# Altium PCB PCB2.PcbDoc
Units mm, origin at the board's own origin, x right, y up, seen from the top; angles counter-clockwise.
Board outline 80.13 x 28.84 mm, 2 copper layers (Top Layer, Bottom Layer); 36 components, 24 nets, 145 pads, 62 vias.
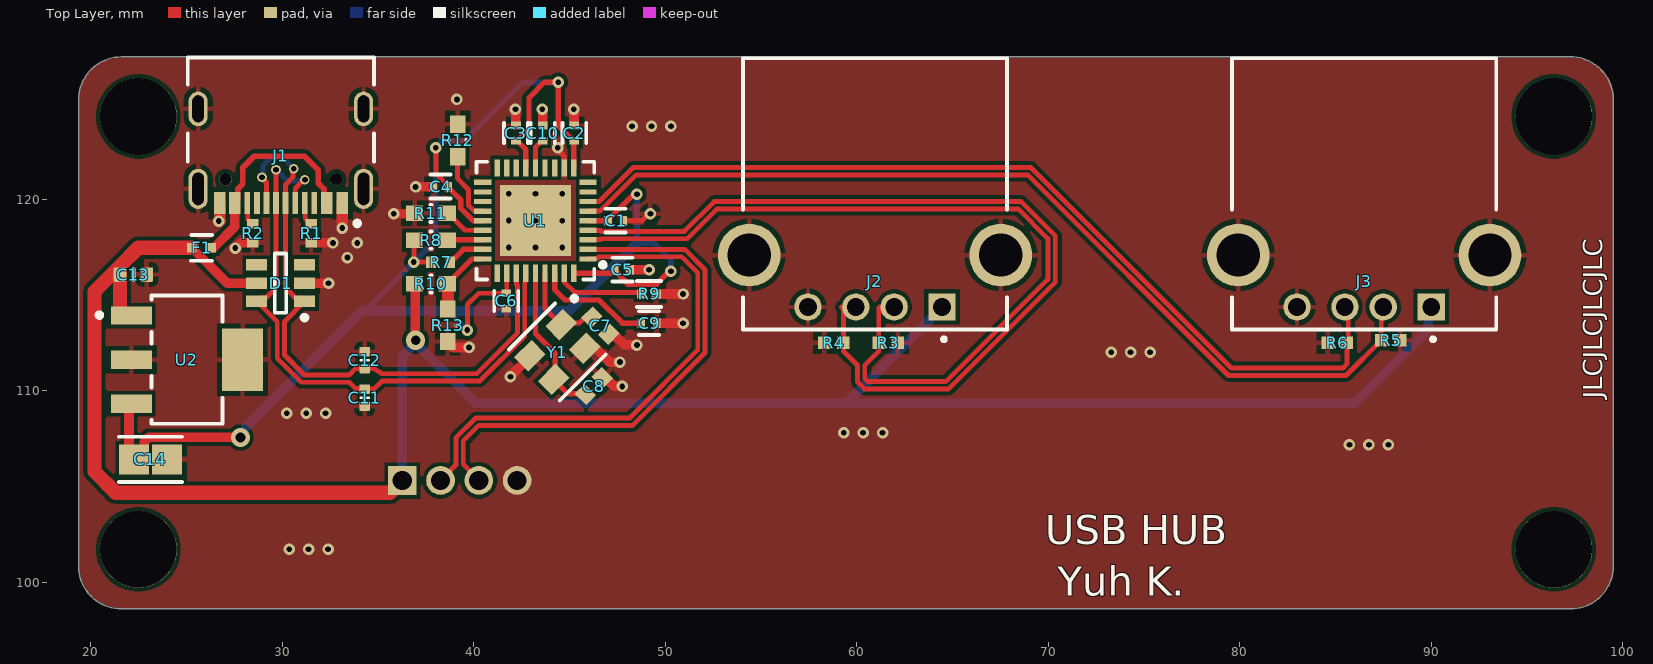
[diagram p0: Top Layer view]
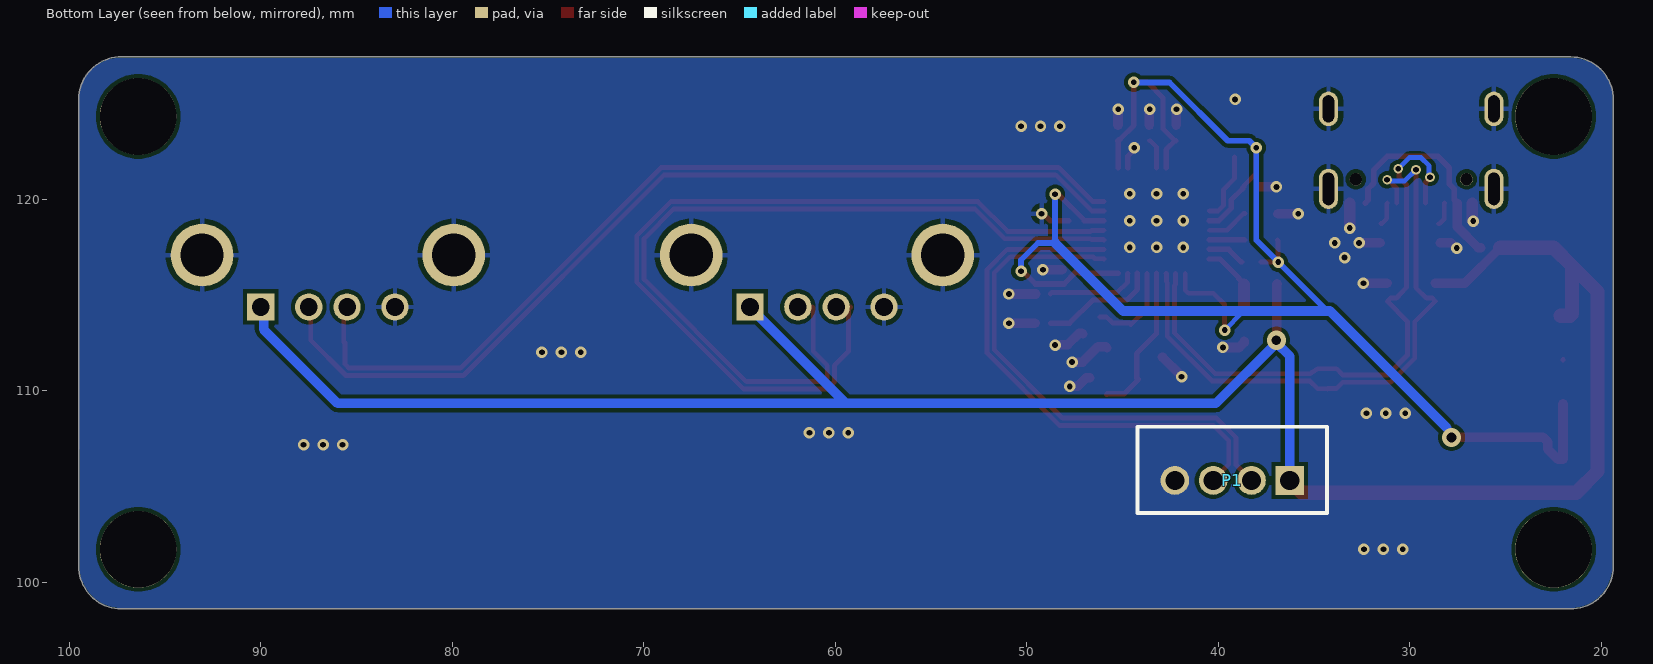
[diagram p1: Bottom Layer view, seen from below]
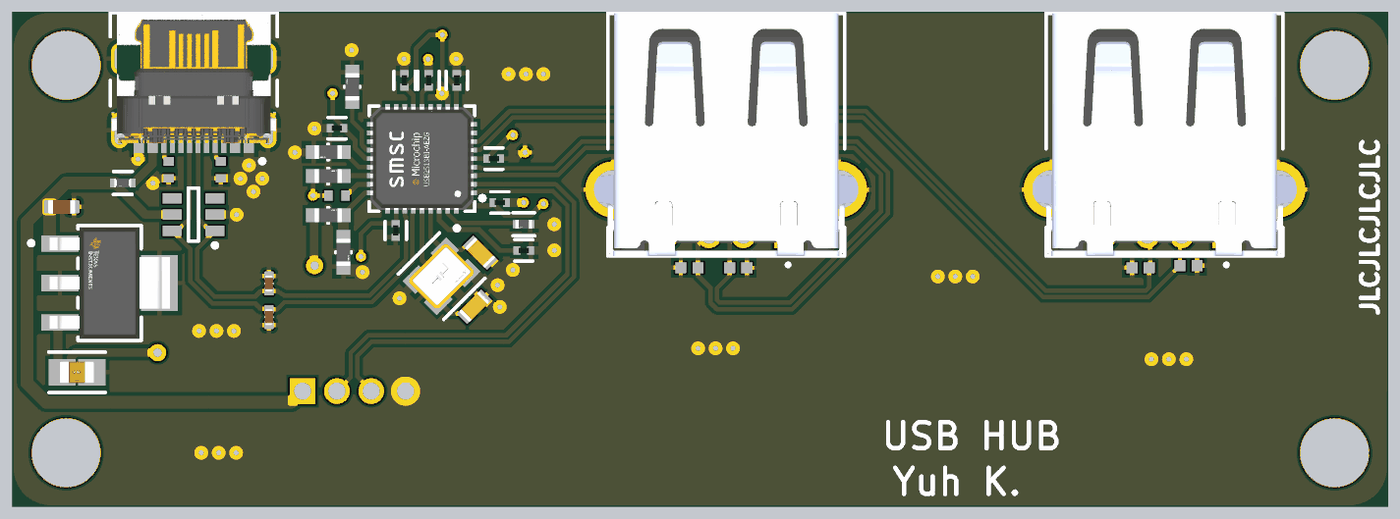
[diagram p2: 3D render of the assembled board from above, using the file's embedded part models]

## Layer stack, top to bottom
Top Solder: solder mask 0.0102, Solder Resist, Dk 3.5
Top Layer: signal copper 0.0356
Dielectric 1: dielectric 0.32, FR-4, Dk 4.8
Bottom Layer: signal copper 0.0356
Bottom Solder: solder mask 0.0102, Solder Resist, Dk 3.5

## Board outline
20.014,99.275 cw(c21.577,100.838) 19.367,100.838 19.367,125.222 cw(c21.621,125.222) 20.027,126.816 20.064,126.834 cw(c21.59,125.235) 21.59,127.445 22.86,127.445 22.862,127.445 96.884,127.445 96.916,127.451 97.258,127.451 cw(c97.258,125.198) 98.851,126.791 cw(c97.288,125.228) 99.498,125.228 99.499,124.741 99.499,124.687 99.499,100.854 cw(c97.245,100.854) 98.839,99.261 cw(c97.276,100.823) 97.276,98.613 96.971,98.613 96.955,98.615 21.608,98.615 cw(c21.608,100.869)

## Design rules (kind name [scope] priority, off if disabled: settings)
Clearance [All] p1: gap=0.2 ignorepadtopadclearanceinfootprint=FALSE except(0.127: Arc-Arc Arc-Track Arc-SMDPad Track-Track Track-SMDPad SMDPad-SMDPad; 0.254: Arc-Via Track-Via SMDPad-Via; 0.33: Arc-THPad Track-THPad SMDPad-THPad; 0.5: THPad-THPad)
DiffPairsRouting [All] p1: maxlimit=0.254 minlimit=0.127 mostfreqgap=0.254 toplayer_minwidth=0.127 toplayer_maxwidth=0.381 toplayer_prefwidth=0.254 bottomlayer_minwidth=0.127 bottomlayer_maxwidth=0.381 bottomlayer_prefwidth=0.254 maxuncoupledlength=12.7
HoleSize [All] p1: absolutevalues=TRUE maxlimit=6.3 minlimit=0.15 maxpercent=80.000 minpercent=20.000
HoleToHoleClearance [All] p1: gap=0.5 allowstackedmicrovias=TRUE
MinimumSolderMaskSliver [All] p1: minsoldermaskwidth=0.1
PolygonConnect PolygonConnect_1 [InComponent('U1')] p1: connectstyle=Direct reliefconductorwidth=0.254 reliefentries=4 polygonreliefangle="90 Angle" airgapwidth=0.254
PolygonConnect [All] p2: connectstyle=Relief reliefconductorwidth=0.254 reliefentries=4 polygonreliefangle="90 Angle" airgapwidth=0.254
RoutingVias [All] p1: holewidth=0.711 width=1.27 viastyle="Through Hole" minholewidth=0.3 minwidth=0.5 maxholewidth=0.711 maxwidth=1.27
SilkToSolderMaskClearance [IsPad] p1: minsilkscreentomaskgap=0.1 clearancetoexposedcopper=TRUE
SolderMaskExpansion [All] p1: expansion=0.102 istentingtop=FALSE
Width [All] p1: maxlimit=0.762 minlimit=0.127 preferedwidth=0.254 minimp=50.000000 maximp=50.000000 favimp=50.000000
25 further rules are at their usual default settings.

## Classes and differential pairs
differential pair PASS_USB_2_D: +PASS_USB_2_D_P -PASS_USB_2_D_N
differential pair PASS_USB_1_D: +PASS_USB_1_D_P -PASS_USB_1_D_N
differential pair MCU_USB_D_R: +MCU_USB_D_R_P -MCU_USB_D_R_N
differential pair HUB_USB_D: +HUB_USB_D_P -HUB_USB_D_N

## Components (designator, comment, footprint, x,y, rotation, side; value= is the part's Value field where it differs from the comment)
C1 "0.1 uF" FP-GRM15-MFG 47.407,118.891 r0 top value=0.10μF
C2 "0.1 uF" FP-GRM15-MFG 45.248,123.463 r90 top value=0.10μF
C3 "0.1 uF" FP-GRM15-MFG 42.2,123.463 r90 top value=0.10μF
C4 "0.1 uF" FP-GRM15-MFG 38.263,120.669 r180 top value=0.10μF
C5 "0.1 uF" FP-GRM15-MFG 47.752,116.332 r0 top value=0.10μF
C6 "0.1 uF" FP-GRM15-MFG 41.692,114.7 r270 top value=0.10μF
C7 "18pF" CAPC1608X90X35LL10T15 46.609,113.411 r135 top
C8 "18pF" CAPC1608X90X35LL10T15 46.264,110.255 r225 top
C9 "0.1 uF" FP-GRM15-MFG 49.149,113.538 r180 top value=0.10μF
C10 "0.1 uF" FP-GRM15-MFG 43.597,123.463 r270 top value=0.10μF
C11 "Capacitor 1nF +/-20% 50V 0402" CAPC0402(1005)33_L 34.298,109.645 r270 top value=1nF
C12 "Capacitor 1nF +/-20% 50V 0402" CAPC0402(1005)33_L 34.301,111.605 r90 top value=1nF
C13 "Capacitor 470nF +/-20% 25V 0603" CAPC0603(1608)100_L 22.225,116.078 r0 top value=470nF
C14 "33uF" FP-C2012-125-0_2-IPC_A 23.114,106.426 r0 top
D1 "SRV05-4.TCT" SMTC-SOT23-6_V 29.904,115.63 r180 top
F1 "ERB-RD0R50X" FP-ERBRD-MFG 25.781,117.475 r180 top value=310mΩ
J1 "USB4105-GF-A" FP-USB4105-GF-A-MFG 29.92,123.566 r180 top
J2 "USB1130-15-A" GCT_USB1130-15-A_REVA 60.946,117.094 r180 top
J3 "USB1130-15-A" GCT_USB1130-15-A_REVA 86.487,117.094 r180 top
P1 "B4B-PH-K-S(LF)(SN)" JST-B4B-PH-K-S_V 39.259,105.876 r0 bottom
R1 "RC0402FR-075K1L" RESC1005X40X25NL05T10 31.496,118.237 r270 top value=5.1k
R2 "RC0402FR-075K1L" RESC1005X40X25NL05T10 28.448,118.237 r270 top value=5.1k
R3 "10k" RESC1005X40X25ML05T05 61.643,112.519 r180 top
R4 "10k" RESC1005X40X25ML05T05 58.801,112.522 r0 top
R5 "10k" RESC1005X40X25ML05T05 87.884,112.649 r180 top
R6 "10k" RESC1005X40X25ML05T05 85.09,112.522 r0 top
R7 "RC0402FR-075K1L" RESC1005X40X25NL05T10 38.263,116.732 r180 top value=5.1k
R8 "100K RC0603FR-07100KL" FP-RC0603-0_55-MFG 37.755,117.875 r0 top
R9 "12K RC0402FR-0712KL" FP-RC0402-0_4-IPC_C 49.149,115.062 r180 top
R10 "100K RC0603FR-07100KL" FP-RC0603-0_55-MFG 37.755,115.589 r0 top
R11 "100K" FP-RC0603-0_55-MFG 37.755,119.272 r180 top
R12 "100K" FP-RC0603-0_55-MFG 39.152,123.082 r90 top
R13 "100K RC0603FR-07100KL" FP-RC0603-0_55-MFG 38.644,113.43 r270 top
U1 "USB2513BI-AEZG" FP-USB2513BI-AEZG-MFG 43.216,118.891 r180 top
U2 "LM3940IMP-3.3/NOPB" FP-DCY0004A-MFG 25.019,111.633 r0 top
Y1 "ABM8-24.000MHZ-D1G-T" FP-ABM8-MFG 44.359,112.033 r225 top

## Footprints (in the part's own frame and the unit in brackets; to place one, negate y for a bottom-side part, rotate by r counter-clockwise, add the part's x,y. Pads: shape width x height; smd on the part's side, far side on the other; paste and mask are expansions set on the pad)
CAPC0402(1005)33_L [mm] "Chip Capacitor, Body 1.0x0.5mm, Height 0.33mm, IPC High Density"
  rrect25% 0.5x0.55 smd: 1(-0.45,0) 2(0.45,0)
  silkscreen extent 0,-0.2 0,0.2, body extent -0.5,-0.25 0.5,0.25, height 0.55
CAPC0603(1608)100_L [mm] "Chip Capacitor, Body 1.6x0.8mm, Height 1.0mm, IPC High Density"
  rrect25% 0.66x0.76 smd: 1(-0.7,0) 2(0.7,0)
  silkscreen extent 0,-0.3 0,0.3, body extent -0.8,-0.4 0.8,0.4, height 0.95
CAPC1608X90X35LL10T15 [mm] "Chip Capacitor, 2-Leads, Body 1.7x0.9mm, IPC High Density"
  rect 0.75x0.85 smd: 1(-0.625,0) 2(0.625,0)
  body extent -0.85,-0.45 0.85,0.45, height 0.9
FP-ABM8-MFG [mm]
  rect 1.3x1.05 smd paste+0 mask+0: 1(-1.15,-0.875) 2(1.15,-0.875) 3(1.15,0.875) 4(-1.15,0.875)
  silkscreen extent -2.73,-1.88 1.7,1.88, body extent -1.9,-1.5 1.9,1.5, height 0.25
FP-C2012-125-0_2-IPC_A [mm]
  rect 1.578x1.556 smd paste+0 mask+0: 1(-0.864,0) 2(0.864,0)
  silkscreen extent -1.65,-1.18 1.65,1.18, body extent -2.15,-1.28 2.15,1.28, height 0.25
FP-DCY0004A-MFG [mm]
  rect 2.15x0.95 smd paste+0 mask+0: 1(-2.9,2.3) 2(-2.9,0) 3(-2.9,-2.3)
  rect 2.15x3.25 smd paste+0 mask+0: 4(2.9,0)
  silkscreen extent -4.7,-3.35 1.85,3.35, body extent -4.08,-3.45 4.08,3.45, height 0.25
FP-ERBRD-MFG [mm]
  rect 0.475x0.5 smd paste+0 mask+0: 1(-0.512,0) 2(0.513,0)
  silkscreen extent -0.56,-0.67 0.55,0.67, body extent -0.85,-0.4 0.85,0.4, height 0.25
FP-GRM15-MFG [mm]
  rect 0.4x0.5 smd paste+0 mask+0: 1(-0.4,0) 2(0.4,0)
  silkscreen extent -0.53,-0.63 0.53,0.63, body extent -0.7,-0.38 0.7,0.38, height 0.25
FP-RC0402-0_4-IPC_C [mm]
  rect 0.515x0.472 smd paste+0 mask+0: 1(-0.379,0) 2(0.379,0)
  silkscreen extent -0.64,-0.67 0.64,0.67, body extent -0.74,-0.38 0.74,0.38, height 0.25
FP-RC0603-0_55-MFG [mm]
  rect 0.9x0.8 smd paste+0 mask+0: 1(-0.85,0) 2(0.85,0)
  silkscreen extent -0.03,-0.45 0.03,0.45, body extent -1.4,-0.55 1.4,0.55, height 0.25
FP-USB2513BI-AEZG-MFG [mm]
  rect 0.9x0.28 smd paste+0 mask+0: 1(-2.75,2) 2(-2.75,1.5) 3(-2.75,1) 4(-2.75,0.5) 5(-2.75,0) 6(-2.75,-0.5) 7(-2.75,-1) 8(-2.75,-1.5) 9(-2.75,-2) 19(2.75,-2) 20(2.75,-1.5) 21(2.75,-1) 22(2.75,-0.5) 23(2.75,0) 24(2.75,0.5) 25(2.75,1) 26(2.75,1.5) 27(2.75,2)
  rect 0.28x0.9 smd paste+0 mask+0: 10(-2,-2.75) 11(-1.5,-2.75) 12(-1,-2.75) 13(-0.5,-2.75) 14(0,-2.75) 15(0.5,-2.75) 16(1,-2.75) 17(1.5,-2.75) 18(2,-2.75) 28(2,2.75) 29(1.5,2.75) 30(1,2.75) 31(0.5,2.75) 32(0,2.75) 33(-0.5,2.75) 34(-1,2.75) 35(-1.5,2.75) 36(-2,2.75)
  rect 3.7x3.7 smd paste+0 mask+0: 37(0,0)
  silkscreen extent -3.65,-3.08 3.08,3.08, body extent -3.3,-3.3 3.3,3.3, height 0.25
FP-USB4105-GF-A-MFG [mm]
  rrect100% 1x2.1 hole 1.7 slot 0.6 at 0 deg paste-1000 mask+0: 1(-4.32,3.015) 2(4.32,3.015)
  rrect100% 1x1.8 hole 1.4 slot 0.6 at 0 deg paste-1000 mask+0: 3(-4.32,-1.165) 4(4.32,-1.165)
  rect 0.6x1.15 smd paste+0 mask+0: A1-B12(-3.2,3.76) A4-B9(-2.4,3.76) B1-A12(3.2,3.76) B4-A9(2.4,3.76)
  rect 0.3x1.15 smd paste+0 mask+0: A5(-1.25,3.76) A6(-0.25,3.76) A7(0.25,3.76) A8(1.25,3.76) B5(1.75,3.76) B6(0.75,3.76) B7(-0.75,3.76) B8(-1.75,3.76)
  round 0.65 hole 0.65 unplated paste-1000 mask+0: ""(-2.89,2.515) ""(2.89,2.515)
  silkscreen extent -4.86,-3.84 4.86,4.95, body extent -4.96,-3.94 4.96,4.27, height 0.25
GCT_USB1130-15-A_REVA [mm]
  rect 1.428x1.428 / inner round 1.428 / far side rect 1.428x1.428 hole 0.92: 1(-3.5,2.71)
  round 1.428 hole 0.92: 2(-1,2.71) 3(1,2.71) 4(3.5,2.71)
  round 3.276 hole 2.26: S1(-6.57,0) S2(6.57,0)
  silkscreen extent -6.9,-10.28 6.9,4.5, body extent -7.8,-10.28 7.8,3.88, height 6.99
JST-B4B-PH-K-S_V [mm] "Connector, 4-Leads, Body 9.9x4.5mm, Pitch 2mm"
  rect 1.5x1.5 hole 1: 1(-3,0.55)
  round 1.5 hole 1: 2(-1,0.55) 3(1,0.55) 4(3,0.55)
  silkscreen extent -4.95,-2.25 4.95,2.25, body extent -4.95,-2.25 4.95,2.25, height 6
RESC1005X40X25ML05T05 [mm] "Chip Resistor, 2-Leads, Body 1.00x0.50mm, IPC Low Density"
  rect 0.65x0.65 smd: 1(-0.5,0) 2(0.5,0)
  body extent -0.53,-0.27 0.53,0.28, height 0.4
RESC1005X40X25NL05T10 [mm] "Chip Resistor, 2-Leads, Body 1.00x0.50mm, IPC Medium Density"
  rect 0.5x0.6 smd: 1(-0.5,0) 2(0.5,0)
  body extent -0.53,-0.27 0.53,0.28, height 0.4
SMTC-SOT23-6_V [mm] "SOT23, 6-Leads, Body 3.15x1.7mm, Pitch 0.95mm"
  rect 1.1x0.6 smd: 1(-1.25,0.95) 2(-1.25,0) 3(-1.25,-0.95) 4(1.25,-0.95) 5(1.25,0) 6(1.25,0.95)
  silkscreen extent -1.38,-1.55 0.3,1.92, body extent -0.87,-1.55 0.87,1.55, height 1.45

## Part data
C1 C2 C3 C4 C5 C6 C9: library part CMP-2100-03641-2, "CAP CER 0.1UF 16V X7R 0402 /  GRM155R71C104KA88D", Capacitance=0.10μF, Manufacturer=Murata, Manufacturer Part Number=GRM155R71C104KA88D, Package=GRM15, Temperature="-55°C to +125°C", Temperature Characteristic=X7R, Temperature Range High=+125°C, Temperature Range Low=-55°C, Tolerance=10%, Voltage Rating=16Vdc, Category=Cap, ComponentLink2Description=Datasheet, ComponentLink2URL=https://search.murata.co.jp/Ceramy/image/img/A01X/G101/ENG/GRM155R71H471KA01-01A.pdf, Device Class L1="Passive Components", Device Class L2=Capacitors, Device Class L3="Ceramic Capacitors", Digikey Description="CAP CER 0.1UF 16V X7R 0402", Height=0.55mm, Ipc Land Pattern Name=CAPC10050X219, Lead Free=yes, Material=Ceramic, Mouser Description="0402 0.1 uF 16V ±10 % Tolerance X7R SMT Multilayer Ceramic Capacitor", Octopart=https://octopart.com/grm155r71c104ka88d-murata-196880, RoHS=TRUE, Standoff Height=0mm
C7 C8: library part CMP-2000-06334-1, "Chip Capacitor, 18 pF, +/- 5%, 50 V, -55 to 125 degC, 0603 (1608 Metric), RoHS, Tape and Reel / GRM1885C1H180JA01D", Manufacturer=Murata, Operating Temperature=-55°C~125°C, Package / Case=0603(1608Metric), Package Description="2-Pin Surface Mount Device, Body 1.6 x 0.8 mm", Package Reference=0603, Ratings=-, Standard Package=4,000, Temperature Coefficient=C0G,NP0, Tolerance=±5%, Voltage - Rated=50V, Applications=GeneralPurpose, Capacitance=18pF, Category=Capacitors, Datasheet URL=http://search.murata.co.jp/Ceramy/image/img/A01X/G101/ENG/GRM1885C1H180JA01-01.pdf, Datasheet Version=03/2016, Family=CeramicCapacitors, Features=-, Height - Seated (Max)=-, Lead Spacing=-, Lead Style=-, Manufacturer URL=http://www.murata.com/, Mounting Technology=SurfaceMount, Mounting Type=SurfaceMount,MLCC, Online Catalog=GRMSeries, Other Names=490-1409-2GRM39C0G180J050AD, Packaging=Tape&Reel(TR), Series=GRM, Size / Dimension="0.063\"Lx0.031\"W(1.60mmx0.80mm)", Thickness (Max)="0.035\"(0.90mm)"
C10: library part CMP-2100-03641-2, "CAP CER 0.1UF 16V X7R 0402", Capacitance=0.10μF, Manufacturer=Murata, Manufacturer Part Number=GRM155R71C104KA88D, Package=GRM15, Temperature="-55°C to +125°C", Temperature Characteristic=X7R, Temperature Range High=+125°C, Temperature Range Low=-55°C, Tolerance=10%, Voltage Rating=16Vdc, Category=Cap, ComponentLink2Description=Datasheet, ComponentLink2URL=https://search.murata.co.jp/Ceramy/image/img/A01X/G101/ENG/GRM155R71H471KA01-01A.pdf, Device Class L1="Passive Components", Device Class L2=Capacitors, Device Class L3="Ceramic Capacitors", Digikey Description="CAP CER 0.1UF 16V X7R 0402", Height=0.55mm, Ipc Land Pattern Name=CAPC10050X219, Lead Free=yes, Material=Ceramic, Mouser Description="0402 0.1 uF 16V ±10 % Tolerance X7R SMT Multilayer Ceramic Capacitor", Octopart=https://octopart.com/grm155r71c104ka88d-murata-196880, RoHS=TRUE, Standoff Height=0mm
C11 C12: library part CMP-001-00066-3, "Chip Capacitor, 1nF +/-20%, 50V, 0402, Thickness 0.33 mm", Case/Package=0402, Max Operating Temperature=85°C, Min Operating Temperature=-55°C, Tolerance=10%, Voltage Rating=50V, Mounting Technology=SMT, Pins=2
C13: library part CMP-001-00077-3, "Chip Capacitor, 470nF +/-20%, 25V, 0603, Thickness 1 mm", Case/Package=0603, Max Operating Temperature=85°C, Min Operating Temperature=-55°C, Tolerance=10%, Voltage Rating=25V, Mounting Technology=SMT, Pins=2
C14: library part CMP-08246-003796-1, "Multilayer Ceramic Capacitors 33μF ±20% 6.3V X5R SMD 0805 / C2012X5R0J336M125AC", Case Code (Imperial)=0805, Case Code (Metric)=2012, Dielectric=X5R, Dielectric Material=Ceramic, Max Operating Temperature=85°C, Min Operating Temperature=-55°C, Package Quantity=1, Tolerance=20%, Voltage Rating=6.3V, Capacitance=33uF, Case/Package=0805, Construction=Flat, Depth=1.25mm, Height=1.25mm, Lead Free="Lead Free", Length=2mm, Mount="Surface Mount", Packaging="Tape and Reel", Radiation Hardening=No, REACH SVHC="No SVHC", Resistor Type=Ceramic, RoHS Compliant=Yes, Series=C, Termination=SMD/SMT, Thickness=0.057inch, Voltage Rating (DC)=6.3V, Weight=0.000194oz, Width=1.2mm
D1: library part CMP-2000-05358-1, "RailClamp(R) Low Capacitance TVS Diode Array, 5 pF, 17.5 VC, -55 to 125 degC, 6-Pin SOT23, RoHS, Tape and Reel", Capacitance Value=5pF, Clamping Voltage=17.5V, Clamping Voltage (Max)=12.5V, Leakage Current=5uA, Manufacturer=Semtech, Operating Temp Range=-55Cto125C, Operating Temperature Classification=Military, Operating Temperature Max Deg. C=125C, Operating Temperature Min Deg. C=-55C, Package / Case=SOT-23, Package Description="6-Pin Small Outline Transistor, Body 2.9 x 1.6 mm, Pitch 0.95 mm", Package Reference=SOT23-6, Peak Pulse Current=12A, Peak Pulse Power Dissipation=300W, Reverse Breakdown Voltage=6V, Reverse Stand-off Voltage=5V, Test Current (It)=1mA, Configuration=Quad, Datasheet URL=https://datasheet.ciiva.com/8029/srv05-4-8029973.pdf, Datasheet Version=Jan-08, Direction Type=Uni-Directional, Leakage Current (Max)=5uA, Manufacturer URL=http://www.semtech.com/, Mounting=SurfaceMount, Mounting Style=SurfaceMount, Number of Elements=1, Packaging=TapeandReel, Pin Count=6, Polarity=Uni-Directional, Product Depth (mm)=1.6mm, Product Height (mm)=1.15mm, Product Length (mm)=2.9mm, Rad Hardened=No, Suppressor Type=DiodeArrays, Working Voltage=5V, Working Voltage (Max)=5V
F1: library part CMP-05590-000002-1, "FUSE BOARD MNT 500MA 32VDC 0402", Fuse Current=0.5A, Fuse Interrupt Dc Current=35A, Manufacturer="Panasonic Electronic Components", Max Fuse Dc Voltage=32V, Package=ERBRD, Resistance=310mΩ, Temperature="-40°C to +125°C", Temperature Range High=+125°C, Temperature Range Low=-40°C, Automotive=No, Category=Fuse, ComponentLink2Description=Datasheet, ComponentLink2URL=https://industrial.panasonic.com/cdbs/www-data/pdf/AFA0000/AFA0000C7.pdf, Device Class L1="Circuit Protection", Device Class L2=Fuses, Device Class L3=unset, Digikey Description="FUSE BOARD MNT 500MA 32VDC 0402", Fuse Blow Speed=Fast, Height=0.49mm, Ipc Land Pattern Name=CAPC10050X39, Lead Free=Yes, Manufacturer Part Number=ERB-RD0R50X, Mouser Description="Fuse Chip Fast Acting 0.5A 32V SMD Solder Pad 0402 1 X 0.5 X 0.39mm T/R UL/cUL", Octopart=https://octopart.com/erb-rd0r50x-panasonic-21220527, RoHS=TRUE, Voltage Rating=32V
J1: library part CMP-002-00072-1, "Conn USB 2.0 Type C RCP 24 POS 0.3mm/0.5mm Solder RA SMD 24 Terminal 1 Port T/R Adjusted for JLCPCB"
J2 J3: library part CMP-002-00071-1, "USB 2.0 Connector Full size Horizontal Plug, type A, 4 Pins, Through hole, Top mount, 6.99mm profile, High mating cycle, charging receptacle", Case/Package=None, Availability="In Stock", Check_prices=https://www.snapeda.com/parts/USB1130-15-A/Global+Connector+Technology/view-part/?ref=eda, Component Type=Standard, Design Item ID=USB1130-15-A_REVA, MF="Global Connector Technology", MP=USB1130-15-A, Pins=6, Price=None, Purchase-URL=https://pricing.snapeda.com/search/part/USB1130-15-A/?ref=eda, SnapEDA_Link=https://www.snapeda.com/parts/USB1130-15-A/Global+Connector+Technology/view-part/?ref=snap, Source=USB1130-15-A_REVA.SchLib
P1: library part CMP-2000-05165-1, "Male Header, Pitch 2 mm, 1 x 4 Position, Height 6 mm, Tail Length 3.4 mm, -25 to 85 degC, RoHS, Bulk", Manufacturer=JST, Datasheet URL=http://datasheet.octopart.com/B4B-PH-K-S%28LF%29%28SN%29-JST-datasheet-10558886.pdf, Datasheet Version=Apr-09, Manufacturer URL=http://www.jst.com/home2.html, No of Positions=4, Pitch=2mm, Style/Orientation=StraightHeader/Plug, Termination=Crimp, Type=ShroudedHeader
R1 R2 R7: library part CMP-009-00178-1, "Fixed Resistor, Metal Glaze/thick Film, 0.0625W, 5100ohm, 50V, 1% +/-Tol, 100ppm/Cel, Surface Mount, 0402", Case/Package=0402, Max Operating Temperature=155°C, Min Operating Temperature=-55°C, Power=62.5mW, Tolerance=1%, Additional Feature="LASER TRIMMABLE", Construction=Chip, JESD-609 Code=e3, Mounting Technology="Surface Mount", Pins=2, RoHS Compliant=Yes
R3 R4 R5 R6: library part CMP-2002-00433-1, "ERJ-2GEJ103X / 10kohm resistor", Manufacturer=Panasonic, Part Number=ERJ-2GEJ103X
R8 R10 R11 R12 R13: library part CMP-2100-03662-2, "RES SMD 100K OHM 1% 1/10W 0603", Case Code (Imperial)=0603, Case Code (Metric)=1608, Max Operating Temperature=155°C, Max Power Dissipation=100mW, Min Operating Temperature=-55°C, Resistance=100kR, Resistance Tolerance=1%, Resistor Type="Thick Film", Temperature Coefficient=100ppm/°C, Voltage Rating=50V, Working Voltage=75V, Case/Package=0603, Construction=Rectangular, Depth=0.8mm, Features="Moisture Resistant", Height=0.45mm, Lead Free="Lead Free", Length=1.6mm, Military Standard=Not, Number of Pins=2, Number of Terminations=2, Packaging="Tape and Reel", Power Rating=100mW, REACH SVHC="No SVHC", RoHS Compliant=Yes, Series=RC, Technology="THICK FILM", Termination=SMD/SMT, Tolerance=1%, Voltage Rating (DC)=50V, Width=0.8mm
R9: library part CMP-2002-07378-2, "RES SMD 12K OHM 1% 1/16W 0402", Case Code (Imperial)=0402, Case Code (Metric)=1005, Max Operating Temperature=155°C, Max Power Dissipation=63mW, Min Operating Temperature=-55°C, Package Quantity=1, Power Rating=62.5mW, Resistance=12kR, Resistance Tolerance=1%, Resistor Type="Thick Film", Temperature Coefficient=100ppm/°C, Voltage Rating=50V, Case/Package=0402, Construction=Rectangular, Depth=0.5mm, Features="Moisture Resistant", Height=0.016inch, Lead Free="Lead Free", Length=1mm, Military Standard=Not, Number of Terminations=2, Packaging="Tape and Reel", REACH SVHC="No SVHC", RoHS Compliant=Yes, Series=RC, Size Code=0402, Termination=SMD/SMT, Tolerance=1%, Weight=2.3E-05oz, Width=0.02inch
U1: library part CMP-06284-000012-1, "IC USB 2.0 3PORT HUB CTLR 36QFN", Ambient Temperature Range High=+85°C, Ambient Temperature Range Low=-40°C, Manufacturer=Microchip, Max Supply Voltage=3.6V, Min Supply Voltage=3V, Nominal Supply Current=35-65mA, Temperature="-40°C to +85°C", Automotive=No, Category=IC, ComponentLink2Description=Datasheet, ComponentLink2URL=http://ww1.microchip.com/downloads/en/DeviceDoc/00001692C.pdf, Device Class L1="Integrated Circuits (ICs)", Device Class L2="Interface ICs", Device Class L3="USB Interface ICs", Digikey Description="IC USB 2.0 3PORT HUB CTLR 36QFN", Height=1mm, Interface=I2C,USB,SMBus, Ipc Land Pattern Name=QFN50P600X600X90-36, Lead Free=Yes, Manufacturer Part Number=USB2513BI-AEZG, Mouser Description="USB2412 Series 2-Port USB 2.0 Hi-Speed Hub Controller - VQFN-36", Number Of Ports=3, Octopart=https://octopart.com/usb2513bi-aezg-microchip-24995419, Package=USB2513BI-AEZG, RoHS=TRUE, Standoff Height=0mm, Temperature Range High=+85°C, Temperature Range Low=-40°C, Usb Standard="USB 2.0"
U2: library part CMP-0062-01788-4, "IC REG LINEAR 3.3V 1A SOT223-4", Case/Package=SOT-223, Current Rating=1A, Dropout Voltage=500mV, Max Input Voltage=7.5V, Max Operating Temperature=125°C, Max Output Voltage=3.3V, Min Input Voltage=4.5V, Min Operating Temperature=-40°C, Package Quantity=1000, Quiescent Current=15mA, Contact Plating=Tin, Height=1.6mm, Lead Free="Lead Free", Length=6.5mm, Max Output Current=1A, Max Supply Voltage=7.5V, Min Supply Voltage=4.5V, Mount="Surface Mount", Nominal Output Voltage=3.3V, Number of Outputs=1, Number of Pins=4, Number of Regulators=1, Output Configuration=Positive, Output Current=1A, Output Type=Fixed, Output Voltage=3.3V, Packaging="Tape and Reel", Polarity=Positive, Radiation Hardening=No, REACH SVHC="No SVHC", Series=-, Termination=SMD/SMT, Width=3.56mm
Y1: library part CMP-27762-011059-1, "Crystal 24MHz ±10ppm 18pF SMD-4 3.2mm x 2.5mm", RoHS Compliant=Yes

## Free pads (board coordinates)
  round 4 hole 4: 2(22.479,124.333) 2(96.393,124.333) 3(22.479,101.727) 3(96.393,101.727)

## Via types
v1: diameter 0.6, hole 0.3, Top Layer to Bottom Layer, 56 vias
v2: diameter 0.5, hole 0.3, Top Layer to Bottom Layer, 4 vias
v3: diameter 1, hole 0.5, Top Layer to Bottom Layer, 2 vias

## Nets (pads, with @x,y where several pads share a name; then routed paths per layer and width w, separated by ;. In a path a pad name is that pad's centre, name@x,y a point inside that pad or via, vN(x,y) a via of type N, cw(c..) or ccw(c..) an arc to the next point about the centre after c; other vN are vias at no path point)
"+3V3 VCC": C1.1 C2.1 C3.1 C4.1 C5.1 C6.1 C14.1 R7.2 R8.1 U1.5 U1.10 U1.15 U1.23 U1.29 U1.36 U2.3 | length 90.1
  Top Layer w0.254: R8.1 36.866,117.836 v1(36.866,116.732) R7.2 ; v1(38.009,122.701) 38.031,122.679 38.031,121.351 38.663,120.719 C4.1 ; v1(39.66,113.176) 39.66,114.515 40.245,115.1 41.554,115.1 41.716,115.262 U1.29
  Top Layer w0.279: C4.1 38.723,120.609 38.723,120.559 39.322,119.96 39.322,119.529 39.96,118.891 U1.23@40.466,118.891 ; C3.1 C3.1@42.25,123.063 ; U1.15 42.716,122.597 C3.1@42.25,123.063 ; U1.10 45.216,123.031 C2.1 45.188,123.123 45.138,123.123 44.403,123.858 v1(44.403,126.122) 43.696,126.122 42.878,125.305 42.878,123.691 C3.1@42.25,123.063 ; U1.5 C1.1 47.007,118.941 v1@48.274,120.208
  Top Layer w0.3: U1.36 47.211,116.141 47.352,116.282 48.045,115.589 49.544,115.589 50.211,116.256 v1(50.292,116.256)
  Top Layer w0.508: U2.3@21.992,109.333 21.996,109.329 C14.1@21.996,106.426 ; C14.1@22.134,106.426 22.261,106.426 22.785,106.95 22.785,107.339 23.031,107.585 27.797,107.585 v3(27.813,107.569)
  Bottom Layer w0.254: 38.735,114.173 38.735,114.101 v1(39.66,113.176)
  Bottom Layer w0.3: v3(27.813,107.569) 27.813,107.758 28.058,108.003 28.058,108.068 ; 34.163,114.173 34.307,114.173 v1(36.866,116.732) 38.009,117.875 v1(38.009,122.701) 38.371,123.063 39.497,123.063 42.538,126.104 44.385,126.104 v1(44.403,126.122) ; v1(48.514,120.269) 48.514,117.729 49.403,117.729 50.292,116.84 v1(50.292,116.256)
  Bottom Layer w0.5: 28.058,108.068 34.163,114.173 ; 34.307,114.173 38.735,114.173 44.958,114.173 48.514,117.729
"+5V VCC": C13.1 D1.5 F1.2 J2.1 J3.1 P1.1 R10.1 U2.1 | length 113.8
  Top Layer w0.5: C13.1@21.525,116.028 C13.1 ; F1.2 27.113,115.63 D1.5 ; R10.1 36.931,115.563 36.931,112.675 v3(36.957,112.649)
  Top Layer w0.75: C13.1@21.525,116.028 21.525,114.033 21.625,113.933 U2.1 ; C13.1 21.525,116.521 ; F1.2 22.479,117.475 21.525,116.521 ; P1.1 35.62,104.687 21.297,104.687 20.193,105.791 20.193,115.189 21.525,116.521
  Bottom Layer w0.5: P1.1 36.259,111.816 v3@36.957,112.514 ; v3(36.957,112.649) v3@36.957,112.514 ; J2.1@64.167,114.078 64.14,114.078 63.982,113.92 63.982,113.893 59.436,109.347 ; J3.1 89.845,114.242 89.845,113.213 85.979,109.347 59.436,109.347 ; v3@36.957,112.514 40.124,109.347 59.436,109.347
GND: C1.2 C2.2 C3.2 C4.2 C5.2 C6.2 C7.1 C8.1 C9.1 C10.1 C11.2 C12.2 C13.2 C14.2 D1.2 J1.1 J1.2 J1.3 J1.4 J1.A1-B12 J1.B1-A12 J2.4 J2.S1 J2.S2 J3.4 J3.S1 J3.S2 P1.4 R1.2 R2.2 R3.1 R4.1 R5.1 R6.1 R9.1 R11.2 R12.2 R13.2 U1.11 U1.37 U2.2 U2.4 Y1.2 Y1.4 | length 25.3
  Top Layer w0.279: U2.2@21.989,111.63 U2.2@21.992,111.633 ; J1.2 J1.2@25.754,120.397 ; R2.2@28.338,117.627 R2.2 ; D1.2 D1.2@31.16,115.624 ; R1.2 R1.2@31.546,117.737 ; J1.1@34.087,120.27 J1.1@34.24,120.424 ; v1(35.814,119.253) v1@35.823,119.262 ; R11.2@36.883,119.294 R11.2 R11.2@36.895,119.262 ; v1(36.957,120.65) v1@36.966,120.659 ; C4.2@37.853,120.659 C4.2 ; v1(42.17,124.715) v1@42.185,124.699 ; C3.2@42.185,123.878 C3.2 C3.2@42.25,123.863 ; v1(44.375,122.696) 44.375,122.609 44.716,122.269 U1.11 ; C1.2 48.769,118.891 49.131,119.253 v1(49.218,119.253)
  Top Layer w0.5: v1(27.539,117.461) 27.566,117.461 27.842,117.737 R2.2@28.398,117.737 ; D1.2@31.16,115.624 v1(32.414,115.624) ; R1.2@31.546,117.737 32.631,117.737 v1(32.639,117.729) ; v1@35.823,119.262 R11.2@36.895,119.262 ; v1@36.966,120.659 C4.2@37.853,120.659 ; R13.2 38.644,112.53 38.904,112.27 R13.2@38.954,112.27 ; v1(39.752,112.269) R13.2@38.955,112.269 ; v1(41.91,110.744) 41.91,110.771 42.9,111.761 Y1.2@42.927,111.761 ; C3.2@42.185,123.878 v1@42.185,124.699 ; v1(43.572,124.703) 43.591,124.684 43.591,123.869 C10.1 ; v1(45.212,124.714) 45.231,124.695 45.231,123.88 C2.2 ; Y1.4@45.821,112.257 45.879,112.316 46.268,112.316 47.078,111.506 v1(47.625,111.506) ; C8.1 46.883,110.697 47.325,110.255 47.733,110.255 v1(47.752,110.236) ; C7.1@47.064,112.983 47.086,113.004 47.263,113.004 47.853,112.414 48.495,112.414 v1(48.514,112.395) ; C5.2 49.146,116.332 v1(49.149,116.329) ; R9.1 v1(50.927,115.062) ; C9.1 v1(50.927,113.538) ; R13.2@38.954,112.27 R13.2@38.955,112.269
  Top Layer w0.6: v1(26.673,118.869) 26.72,118.916 J1.B1-A12 ; J1.A1-B12 33.12,118.518 v1(33.134,118.504)
  other v1: 30.353,101.727 31.369,101.727 32.385,101.727 85.725,107.188 86.741,107.188 87.757,107.188 59.309,107.823 60.325,107.823 61.341,107.823 30.226,108.839 31.242,108.839 32.258,108.839 73.279,112.014 74.295,112.014 75.311,112.014 33.401,116.967 41.816,117.491 43.216,117.491 44.616,117.491 33.909,117.729 41.816,118.895 43.216,118.891 44.616,118.891 41.816,120.291 43.216,120.291 44.616,120.291 48.26,123.825 49.276,123.825 50.292,123.825 39.116,125.222
HUB_USB_D_N: C11.1 D1.6 J1.A7 J1.B7 U1.31 | length 32.1
  Top Layer w0.254: v2(29.668,121.552) 29.67,121.55 J1.A7@29.67,119.829 ; J1.A7 29.67,115.395 29.128,114.853 28.827,114.853 D1.6 29.73,113.605 29.73,111.718 30.995,110.452 33.491,110.452 33.813,110.13 34.263,110.13 C11.1 34.315,110.112 34.801,110.112 35.207,110.518 40.318,110.518 42.655,112.856 42.655,115.67 42.703,115.718 42.703,116.128 U1.31 ; J1.B7 30.67,120.57 31.123,121.023 v2(31.177,121.023)
  Bottom Layer w0.254: v2(29.668,121.552) 30.252,120.968 31.055,120.968 31.11,121.023 v2(31.177,121.023)
HUB_USB_D_P: C12.1 D1.1 J1.A6 J1.B6 U1.30 | length 31.8
  Top Layer w0.254: v2(28.935,121.157) 28.935,121.121 29.17,120.886 J1.B6 ; v2(30.598,121.599) 30.551,121.552 30.551,121.158 30.17,120.778 J1.A6 30.17,115.395 D1.1@30.689,114.853 ; D1.1@30.689,114.853 30.981,114.853 D1.1 30.111,113.605 30.111,111.875 31.153,110.833 33.491,110.833 33.813,111.155 C12.1 34.801,111.155 35.207,110.899 40.16,110.899 42.274,113.013 42.274,115.506 42.229,115.551 42.229,116.128 U1.30
  Bottom Layer w0.254: v2(28.935,121.157) 28.982,121.205 28.982,121.759 29.407,122.183 30.013,122.183 v2(30.598,121.599)
MCU_USB_D_R_N: P1.2 U1.1 | length 27.2
  Top Layer w0.254: P1.2 39.064,106.131 39.064,107.547 40.101,108.585 48.133,108.585 51.689,112.141 51.689,116.174 50.853,117.01 46.534,117.01 46.428,116.904 45.979,116.904 U1.1
MCU_USB_D_R_P: P1.3 U1.2 | length 27.8
  Top Layer w0.254: P1.3 40.259,105.354 39.445,106.169 39.445,107.39 40.259,108.204 48.291,108.204 52.07,111.983 52.07,116.332 51.011,117.391 U1.2
NetC9_2: C9.2 U1.34 | length 6.1
  Top Layer w0.279: U1.34 44.216,115.296 44.76,114.752 46.538,114.752 47.752,113.538 C9.2
NetC10_2: C10.2 U1.14 | length 1.6
  Top Layer w0.254: U1.14 43.216,122.732 43.547,123.063 C10.2
NetF1_1: F1.1 J1.A4-B9 J1.B4-A9 | length 11.3
  Top Layer w0.3: F1.1 F1.1@26.302,117.483 ; J1.B4-A9 27.67,119.956 27.67,120.552 27.926,120.809 27.926,121.652 28.527,122.253 31.163,122.253 31.877,121.539 31.877,120.846 32.17,120.552 32.17,119.956 J1.A4-B9
  Top Layer w0.5: F1.1 26.416,117.475 27.52,118.579 J1.B4-A9
NetR7_1: R7.1 U1.26 | length 2
  Top Layer w0.279: R7.1@38.771,116.732 38.796,116.732 39.455,117.391 U1.26
NetR8_2: R8.2 U1.25 | length 1.9
  Top Layer w0.254: R8.2 R8.2@38.621,117.891
  Top Layer w0.279: R8.2@38.621,117.891 U1.25
NetR9_2: R9.2 U1.35 | length 4.8
  Top Layer w0.254: U1.35 44.729,116.128 44.729,115.679 45.262,115.146 48.687,115.146 R9.2
NetR10_2: R10.2 R13.1 U1.27 | length 3.8
  Top Layer w0.279: R10.2@38.644,115.55 R10.2 38.655,115.589 38.915,115.849 38.915,115.899 39.907,116.891 U1.27
  Top Layer w0.635: R13.1 R10.2@38.644,115.55
PASS_USB_1_D_N: J2.2 R3.2 U1.3 | length 43.4
  Top Layer w0.254: U1.3 45.979,117.904 46.608,117.904 46.654,117.951 51.149,117.951 52.705,119.507 68.422,119.507 69.977,117.952 69.977,115.824 64.643,110.49 60.561,110.49 60.413,110.639 60.413,111.336 61.143,112.067 R3.2 61.143,114.329 61.198,114.384
PASS_USB_1_D_P: J2.3 R4.2 U1.4 | length 45.3
  Top Layer w0.254: U1.4 45.979,118.378 46.608,118.378 46.654,118.332 50.991,118.332 52.547,119.888 68.58,119.888 70.358,118.11 70.358,115.666 64.801,110.109 60.404,110.109 60.032,110.481 60.032,111.339 59.301,112.07 R4.2 59.301,114.281 59.198,114.384
PASS_USB_2_D_N: J3.2 R5.2 U1.6 | length 49.1
  Top Layer w0.254: U1.6 45.979,119.404 46.595,119.404 46.701,119.51 46.707,119.51 48.482,121.285 68.93,121.285 79.408,110.807 85.542,110.807 R5.2 87.384,114.281 J3.2
PASS_USB_2_D_P: J3.3 R6.2 U1.7 | length 47.8
  Top Layer w0.254: U1.7 46.549,119.891 48.324,121.666 69.088,121.666 79.566,111.188 85.385,111.188 85.59,111.394 R6.2 ; J3.3 85.659,114.212 R6.2@85.659,112.522
SCL_HUB: R11.1 U1.24 | length 2.2
  Top Layer w0.254: R11.1 38.655,119.272 39.536,118.391 U1.24
SDA_HUB: R12.1 U1.22 | length 3.6
  Top Layer w0.254: R12.1 39.152,121.082 39.715,120.519 39.715,119.692 40.004,119.404 40.453,119.404 U1.22
USB_CC1: J1.A5 R1.1 | length 1.2
  Top Layer w0.254: J1.A5 31.193,119.783 31.193,118.99 31.446,118.737 R1.1
USB_CC2: J1.B5 R2.1 | length 1.2
  Top Layer w0.254: J1.B5 28.193,119.783 28.193,118.977 28.442,118.728 R2.1@28.492,118.728
XTALIN_BUS: C7.2 U1.33 Y1.1 | length 4.8
  Top Layer w0.254: U1.33 43.716,114.302 Y1.1 44.642,113.553 45.517,113.553 45.816,113.853 C7.2
XTALOUT_BUS: C8.2 U1.32 Y1.3 | length 8
  Top Layer w0.279: U1.32 43.216,112.994 44.253,111.957 44.253,110.689 Y1.3 44.917,109.848 45.787,109.848 C8.2
pads on no net: D1.3 D1.4 J1. J1.A8 J1.B8 U1.8 U1.9 U1.12 U1.13 U1.16 U1.17 U1.18 U1.19 U1.20 U1.21 U1.28

## Polygon pours and split planes (outlines as drawn)
GND on Bottom Layer "GND_L02_P000" (solid, pour order 0): 19.431,125.349 cw(c21.463,125.349) 21.463,127.381 97.409,127.381 cw(c97.368,125.26) 99.489,125.219 99.441,100.838 cw(c97.282,100.838) 97.282,98.679 21.59,98.679 cw(c21.59,100.838) 19.431,100.838
GND on Top Layer "GND_L01_P001" (solid, pour order 1): 19.431,125.349 cw(c21.463,125.349) 21.463,127.381 97.409,127.381 cw(c97.368,125.26) 99.489,125.219 99.441,100.838 cw(c97.282,100.838) 97.282,98.679 21.59,98.679 cw(c21.59,100.838) 19.431,100.838

## Silkscreen, mask and mechanical layers (free items; w line width, h text height)
Top Overlay:
  text "JLCJLCJLCJLC" at 98.933,109.601 h1 r90
  text "USB HUB" at 69.85,101.981 h1.52
  text "Yuh K." at 70.485,99.314 h1.52
Mechanical 1:
  lines w0.127: 20.072,126.752 cw(c21.59,125.235) 21.59,127.381 22.86,127.381 ; 20.072,126.77 ccw(c21.621,125.222) 19.431,125.222 19.431,124.968 19.431,100.838 ccw(c21.577,100.838) 20.06,99.32 ccw(c21.608,100.869) 21.608,98.679 96.966,98.679 ccw(c96.971,98.684) 96.971,98.677 97.276,98.677 ccw(c97.276,100.823) 98.794,99.306 ccw(c97.245,100.854) 99.435,100.854 99.435,124.7 ; 99.441,124.714 ccw(c99.455,124.7) 99.435,124.7 ; 22.86,127.381 ccw(c22.86,127.381) 22.86,127.381 ; 22.86,127.381 96.901,127.381 cw(c96.916,127.366) 96.916,127.387 97.258,127.387 cw(c97.258,125.198) 98.806,126.746 cw(c97.288,125.228) 99.435,125.228 99.435,124.7 ; 99.435,124.7 ccw(c99.435,124.7) 99.435,124.7

## Text inside footprints (layer, text, board x,y; h text height)
J2: Top 3D Body "PCB EDGE" at 53.496,127.094 h0.81 r180
J3: Top 3D Body "PCB EDGE" at 79.037,127.094 h0.81 r180